# EAGLE board answer (EAGLE 7.7.0)

Size 60 x 40 mm. Coordinates in mm from the lower left corner, seen from the top.
Outline: 0,0 60,0 60,40 0,40 0,0
Copper layers used: 

## Footprints (pad centres in the part's own frame; a part is rotated, then mirrored left to right if it is on the bottom)
C025 = drill 0.6 pad 1.2: 1 -1.27,0; 2 1.27,0
DIL8 = drill 0.8 pad 1.6: 1 -3.81,-3.81; 2 -1.27,-3.81; 3 1.27,-3.81; 4 3.81,-3.81; 5 3.81,3.81; 6 1.27,3.81; 7 -1.27,3.81; 8 -3.81,3.81

## Placement (x,y rotation side)
C3  100n  [C025]  25,19 0 top
C4  100n  [C025]  27,19.5 0 top
C5  100n  [C025]  26.5,17.5 0 top
IC1  GENERIC  [DIL8]  30,15 0 top

## Library data of the parts
C3-C5 IC1 = stub

## Nets
GND: C3.1 C4.1 C5.1 IC1.4
VCC: C3.2 C4.2 C5.2 IC1.8